# Altium PCB PokerFaceTestBoard.PcbDoc
Units mm, origin at the board's own origin, x right, y up, seen from the top; angles counter-clockwise.
Board outline 90.68 x 59.69 mm, 2 copper layers (Top Layer, Bottom Layer); 164 components, 159 nets, 418 pads, 38 vias.
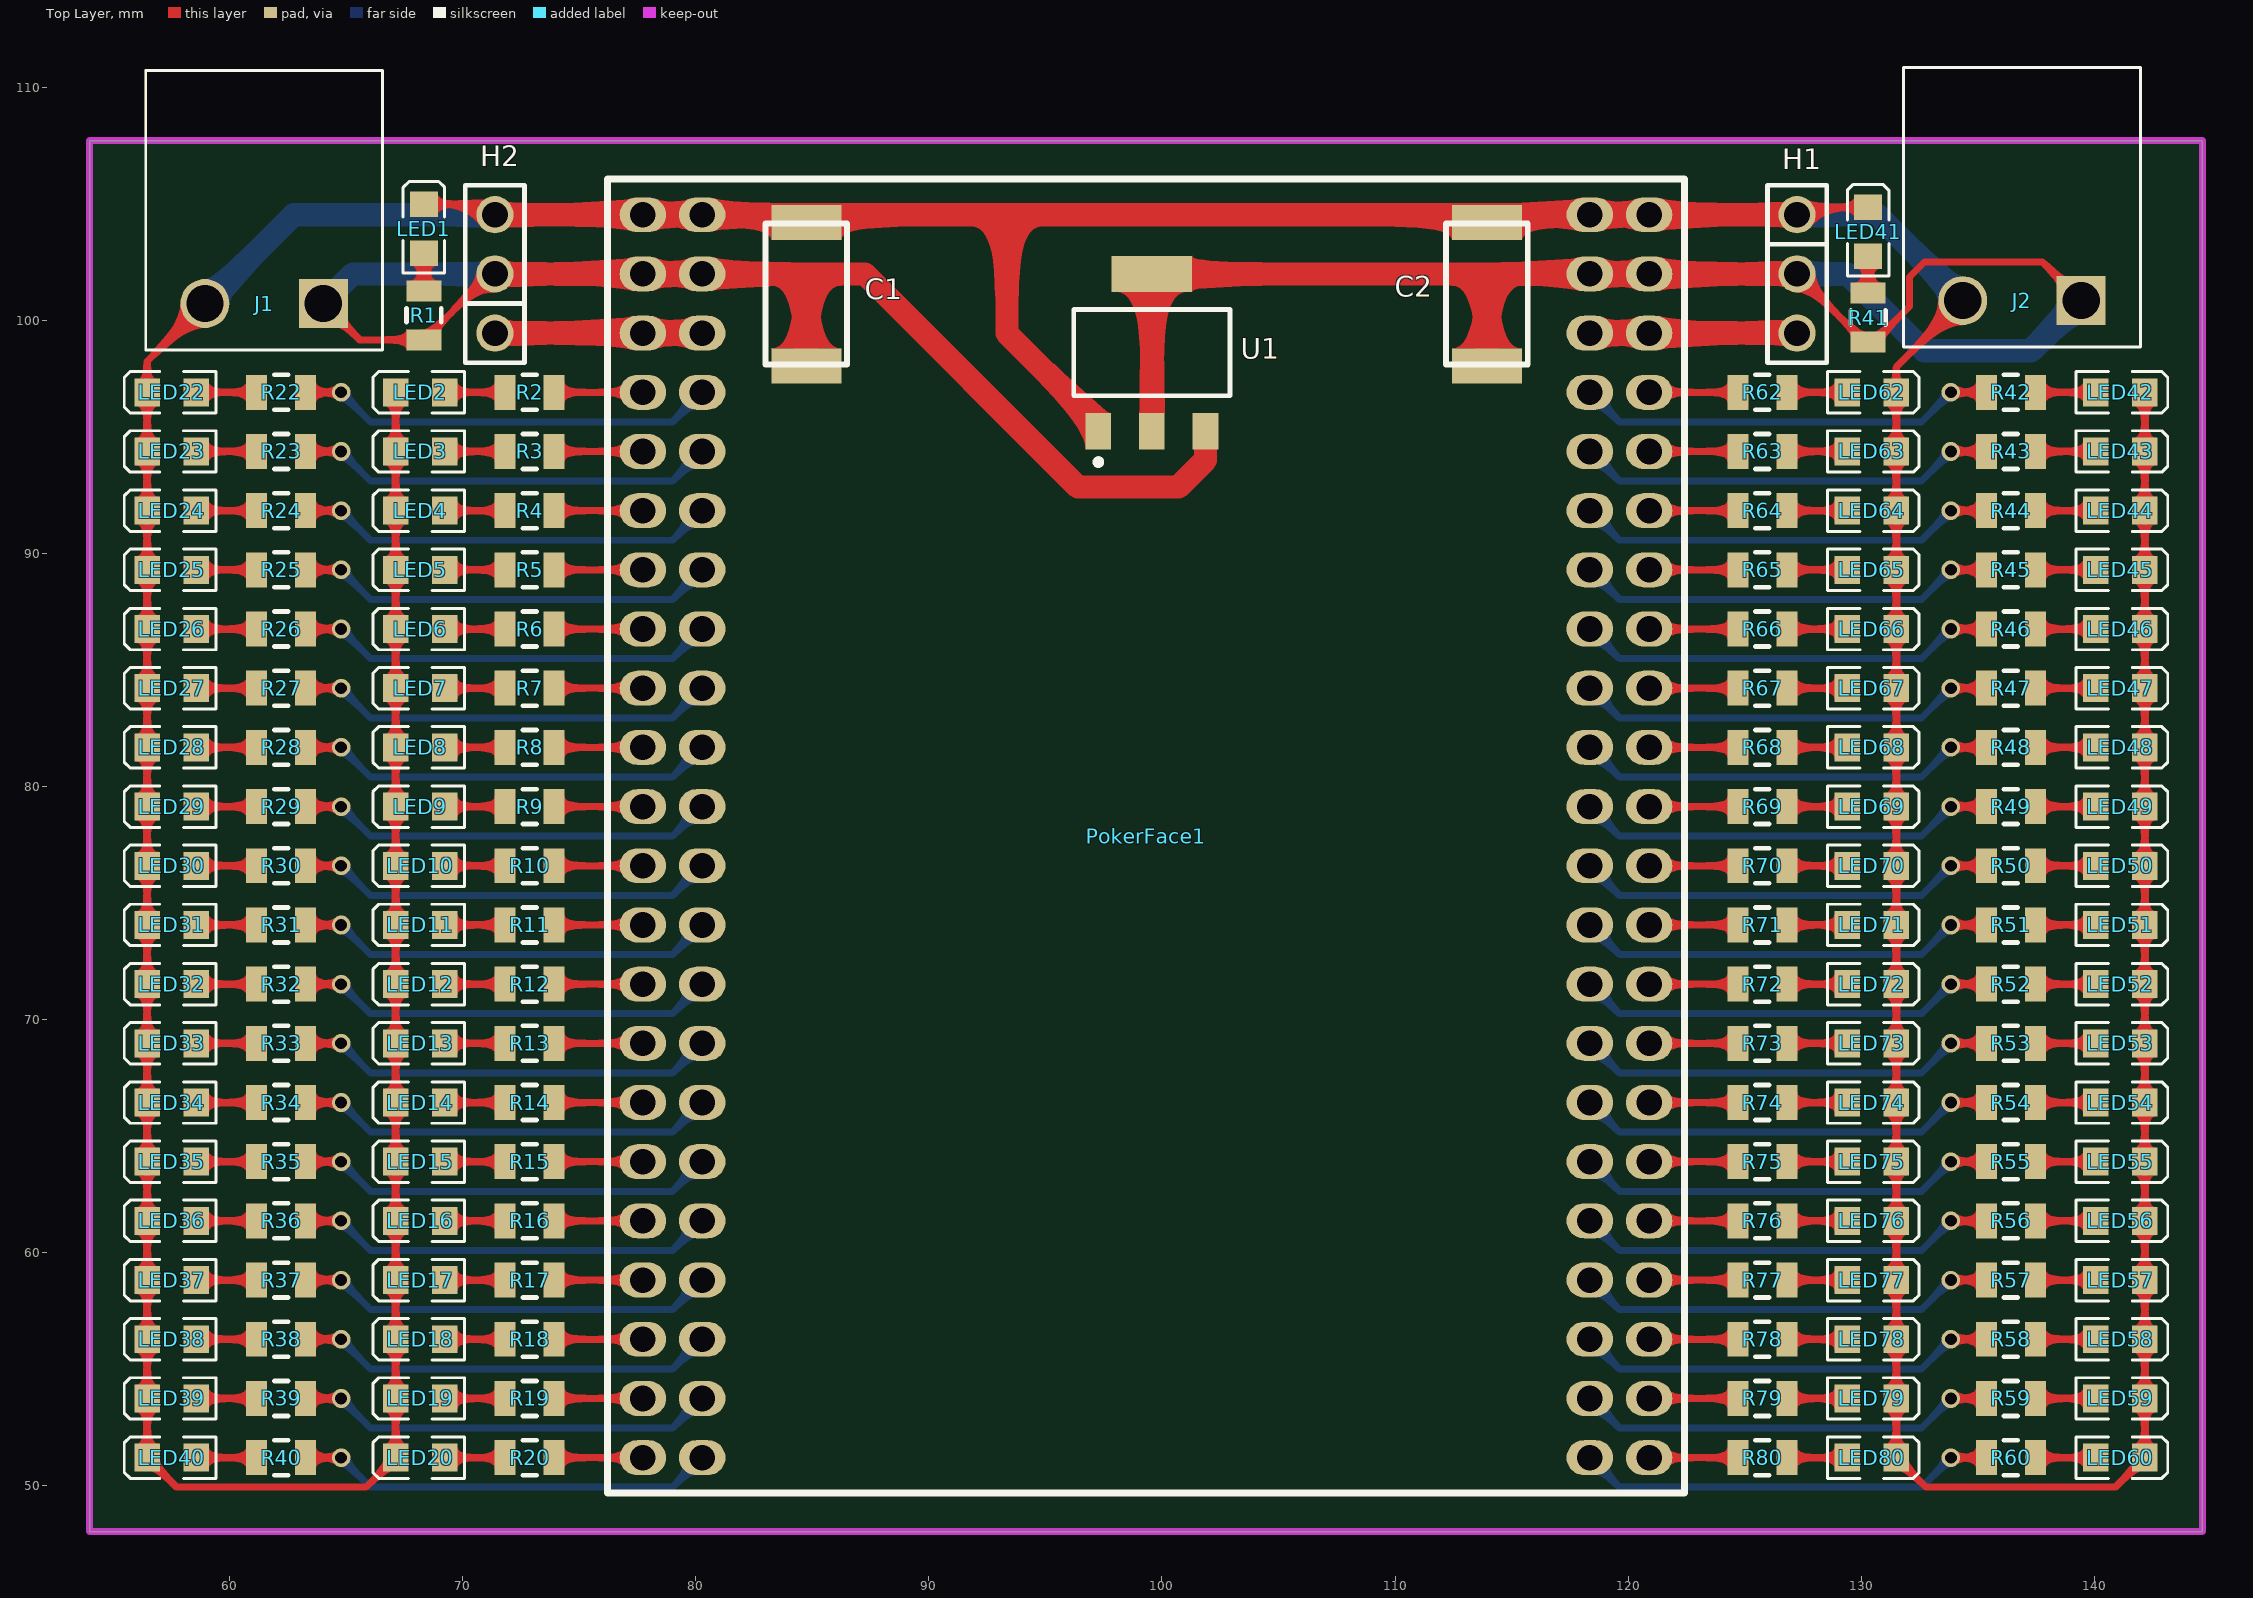
[diagram p0: Top Layer view]
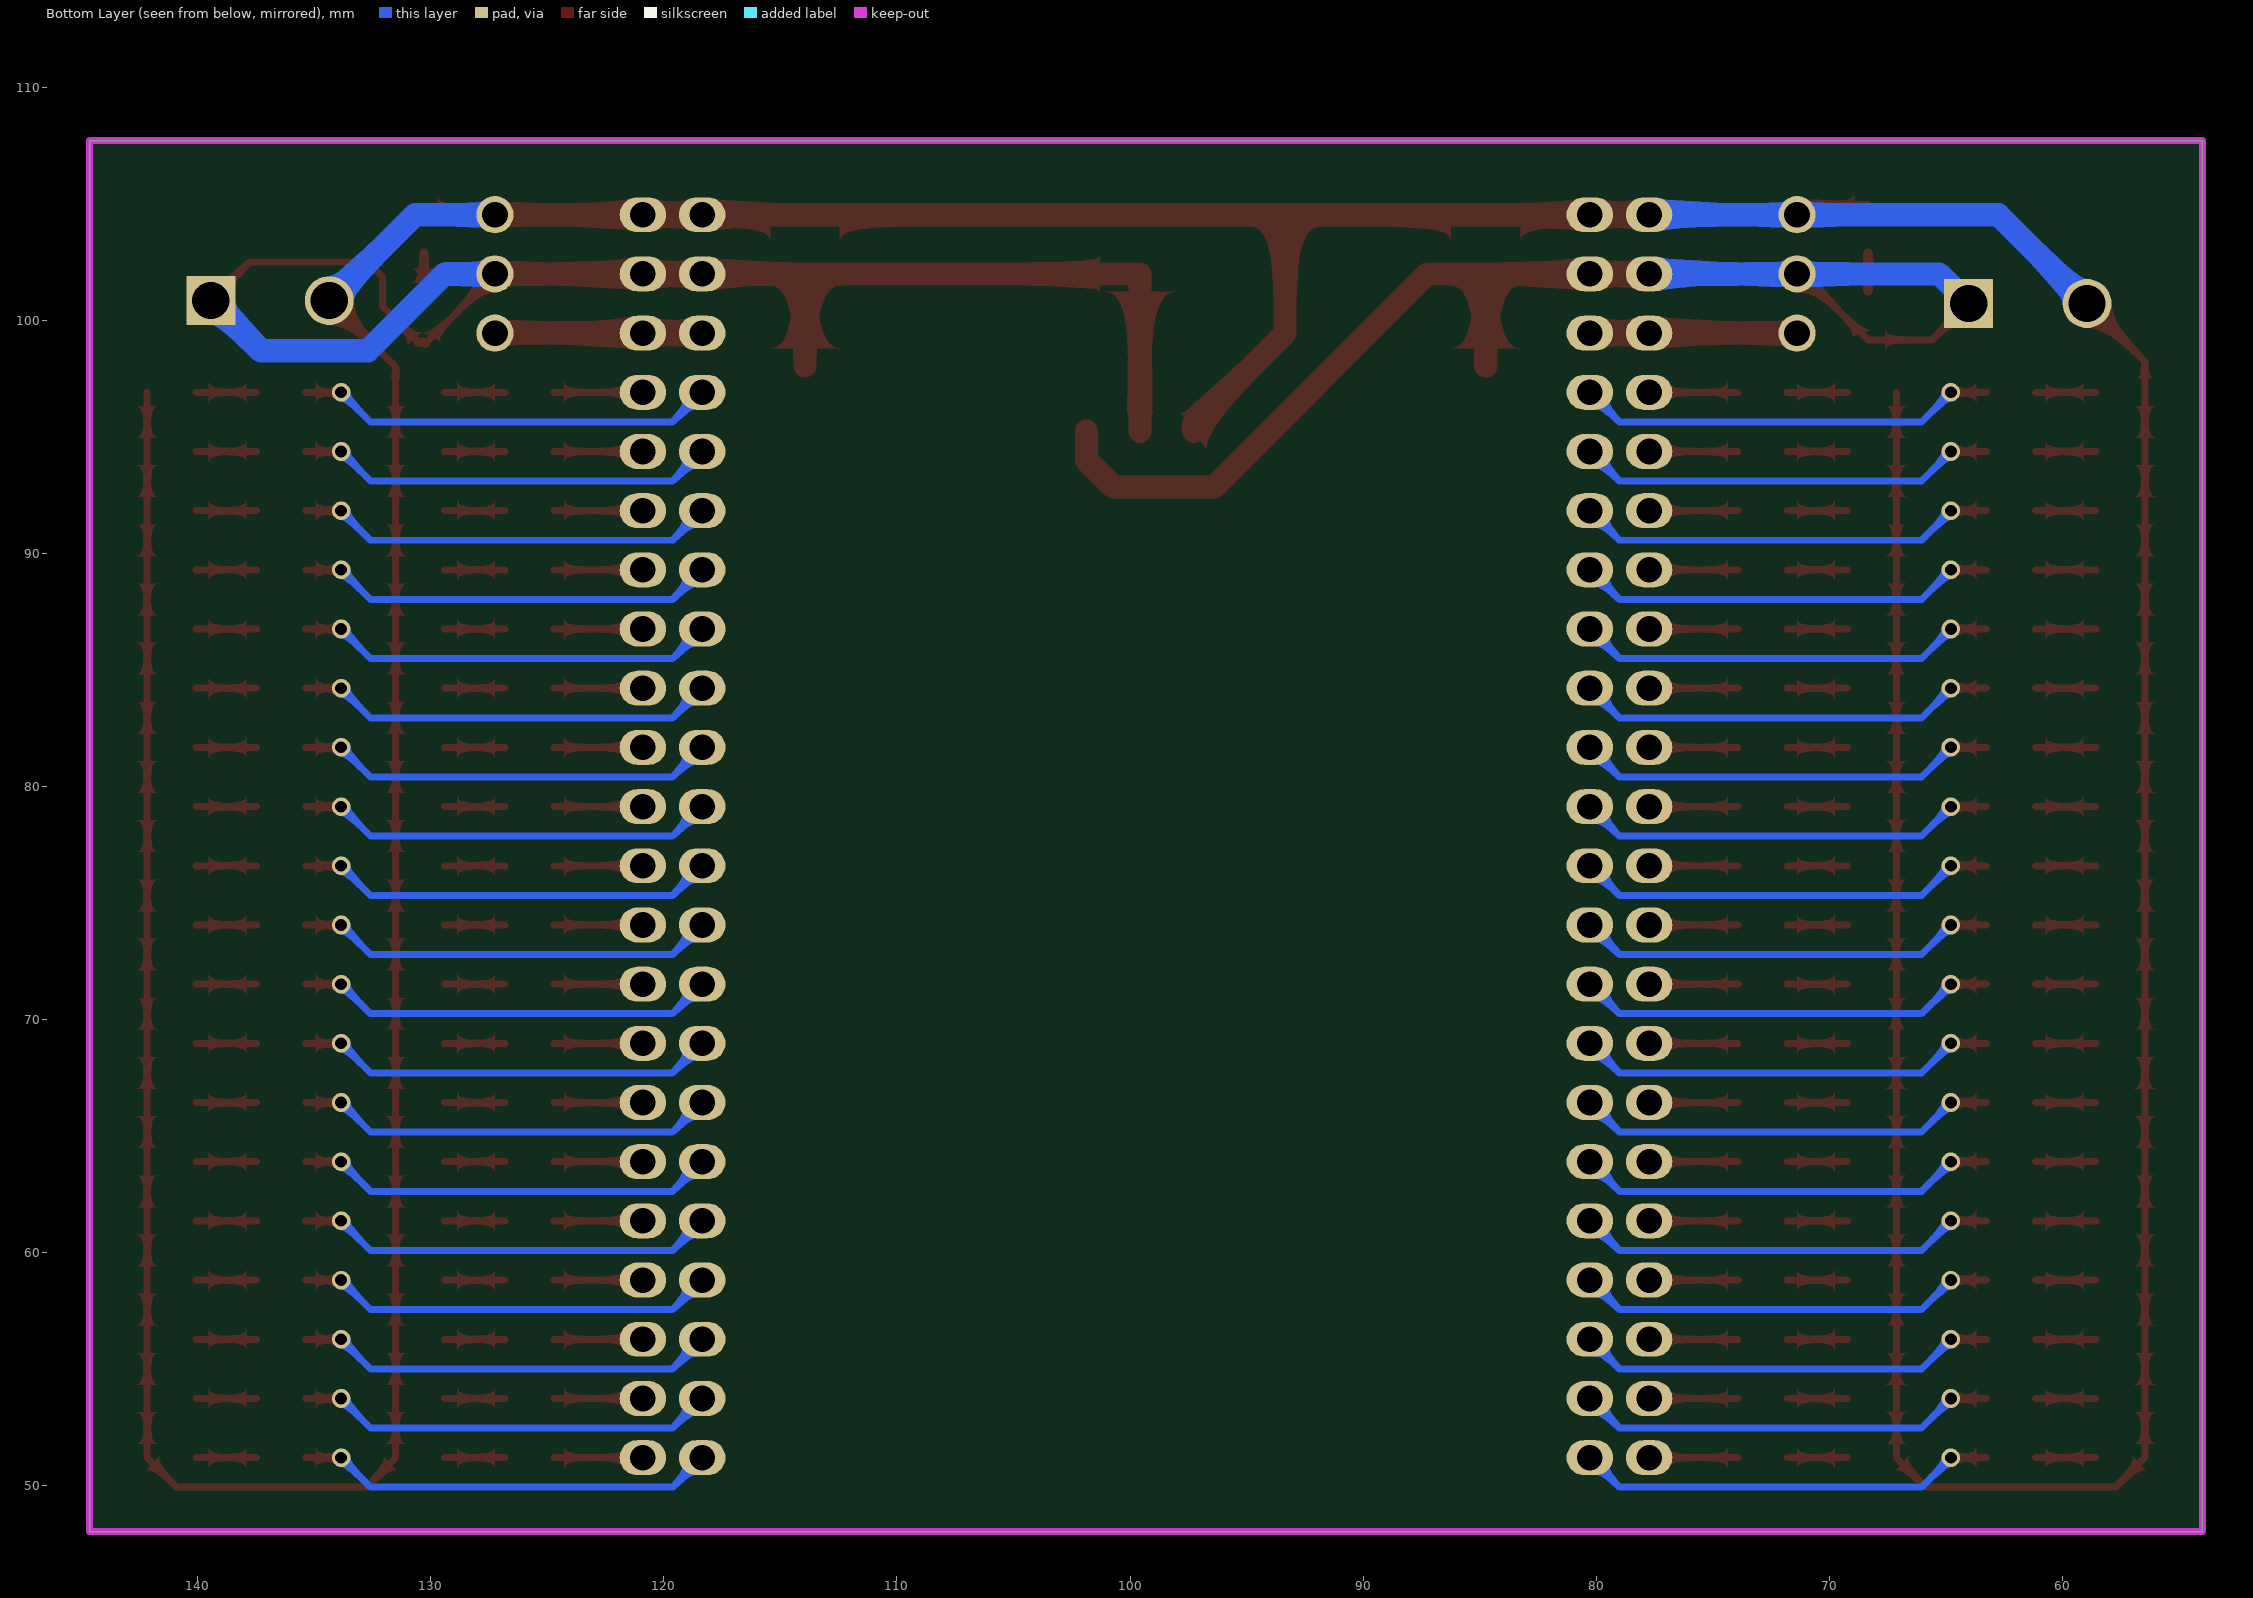
[diagram p1: Bottom Layer view, seen from below]

## Layer stack, top to bottom
Top Solder: solder mask 0.0102, Solder Resist, Dk 3.5
Top Layer: signal copper 0.0356
Dielectric 1: dielectric 0.32, FR-4, Dk 4.8
Bottom Layer: signal copper 0.0356
Bottom Solder: solder mask 0.0102, Solder Resist, Dk 3.5

## Board outline
53.975,48.006 53.975,107.696 144.653,107.696 144.653,48.006

## Design rules (kind name [scope] priority, off if disabled: settings)
Clearance [All] p1: gap=0.2 ignorepadtopadclearanceinfootprint=FALSE
PolygonConnect [All] p1: connectstyle=Relief reliefconductorwidth=0.254 reliefentries=4 polygonreliefangle="90 Angle" airgapwidth=0.254
RoutingVias [All] p1: holewidth=0.711 width=1.27 viastyle="Through Hole" minholewidth=0.711 minwidth=1.27 maxholewidth=0.711 maxwidth=1.27
SolderMaskExpansion [All] p1: expansion=0.102
Width [All] p1: maxlimit=1 minlimit=0.2 preferedwidth=0.4
30 further rules are at their usual default settings.

## Components (designator, comment, footprint, x,y, rotation, side; value= is the part's Value field where it differs from the comment)
C1 "TantalD-220uF" MY_CAP_SMD-D 84.836,100.838 r90 top value=3300u
C2 "TantalD-220uF" MY_CAP_SMD-D 114.046,100.838 r90 top value=3300u
H1 "WE-2.54 mm Pin Header & Jumper 61300311121" 61300311121 127.254,104.521 r270 top
H2 "WE-2.54 mm Pin Header & Jumper 61300311121" 61300311121 71.374,99.441 r90 top
J1 "691312510002" 691312510002 61.468,100.711 r180 top
J2 "691312510002" 691312510002 136.906,100.838 r180 top
LED1 "150080BS75000" LED_0805_Blue 68.326,103.92 r90 top
LED2 "150080BS75000" LED_0805_Blue 68.165,96.901 r180 top
LED3 "150080BS75000" LED_0805_Blue 68.165,94.361 r180 top
LED4 "150080BS75000" LED_0805_Blue 68.165,91.821 r180 top
LED5 "150080BS75000" LED_0805_Blue 68.165,89.281 r180 top
LED6 "150080BS75000" LED_0805_Blue 68.165,86.741 r180 top
LED7 "150080BS75000" LED_0805_Blue 68.165,84.201 r180 top
LED8 "150080BS75000" LED_0805_Blue 68.165,81.661 r180 top
LED9 "150080BS75000" LED_0805_Blue 68.165,79.121 r180 top
LED10 "150080BS75000" LED_0805_Blue 68.165,76.581 r180 top
LED11 "150080BS75000" LED_0805_Blue 68.165,74.041 r180 top
LED12 "150080BS75000" LED_0805_Blue 68.165,71.501 r180 top
LED13 "150080BS75000" LED_0805_Blue 68.165,68.961 r180 top
LED14 "150080BS75000" LED_0805_Blue 68.165,66.421 r180 top
LED15 "150080BS75000" LED_0805_Blue 68.165,63.881 r180 top
LED16 "150080BS75000" LED_0805_Blue 68.165,61.341 r180 top
LED17 "150080BS75000" LED_0805_Blue 68.165,58.801 r180 top
LED18 "150080BS75000" LED_0805_Blue 68.165,56.261 r180 top
LED19 "150080BS75000" LED_0805_Blue 68.165,53.721 r180 top
LED20 "150080BS75000" LED_0805_Blue 68.165,51.181 r180 top
LED22 "150080BS75000" LED_0805_Blue 57.497,96.901 r180 top
LED23 "150080BS75000" LED_0805_Blue 57.497,94.361 r180 top
LED24 "150080BS75000" LED_0805_Blue 57.497,91.821 r180 top
LED25 "150080BS75000" LED_0805_Blue 57.497,89.281 r180 top
LED26 "150080BS75000" LED_0805_Blue 57.497,86.741 r180 top
LED27 "150080BS75000" LED_0805_Blue 57.497,84.201 r180 top
LED28 "150080BS75000" LED_0805_Blue 57.497,81.661 r180 top
LED29 "150080BS75000" LED_0805_Blue 57.497,79.121 r180 top
LED30 "150080BS75000" LED_0805_Blue 57.497,76.581 r180 top
LED31 "150080BS75000" LED_0805_Blue 57.497,74.041 r180 top
LED32 "150080BS75000" LED_0805_Blue 57.497,71.501 r180 top
LED33 "150080BS75000" LED_0805_Blue 57.497,68.961 r180 top
LED34 "150080BS75000" LED_0805_Blue 57.497,66.421 r180 top
LED35 "150080BS75000" LED_0805_Blue 57.497,63.881 r180 top
LED36 "150080BS75000" LED_0805_Blue 57.497,61.341 r180 top
LED37 "150080BS75000" LED_0805_Blue 57.497,58.801 r180 top
LED38 "150080BS75000" LED_0805_Blue 57.497,56.261 r180 top
LED39 "150080BS75000" LED_0805_Blue 57.497,53.721 r180 top
LED40 "150080BS75000" LED_0805_Blue 57.497,51.181 r180 top
LED41 "150080BS75000" LED_0805_Blue 130.302,103.793 r90 top
LED42 "150080BS75000" LED_0805_Blue 141.131,96.901 r0 top
LED43 "150080BS75000" LED_0805_Blue 141.131,94.361 r0 top
LED44 "150080BS75000" LED_0805_Blue 141.131,91.821 r0 top
LED45 "150080BS75000" LED_0805_Blue 141.131,89.281 r0 top
LED46 "150080BS75000" LED_0805_Blue 141.131,86.741 r0 top
LED47 "150080BS75000" LED_0805_Blue 141.131,84.201 r0 top
LED48 "150080BS75000" LED_0805_Blue 141.131,81.661 r0 top
LED49 "150080BS75000" LED_0805_Blue 141.131,79.121 r0 top
LED50 "150080BS75000" LED_0805_Blue 141.131,76.581 r0 top
LED51 "150080BS75000" LED_0805_Blue 141.131,74.041 r0 top
LED52 "150080BS75000" LED_0805_Blue 141.131,71.501 r0 top
LED53 "150080BS75000" LED_0805_Blue 141.131,68.961 r0 top
LED54 "150080BS75000" LED_0805_Blue 141.131,66.421 r0 top
LED55 "150080BS75000" LED_0805_Blue 141.131,63.881 r0 top
LED56 "150080BS75000" LED_0805_Blue 141.131,61.341 r0 top
LED57 "150080BS75000" LED_0805_Blue 141.131,58.801 r0 top
LED58 "150080BS75000" LED_0805_Blue 141.131,56.261 r0 top
LED59 "150080BS75000" LED_0805_Blue 141.131,53.721 r0 top
LED60 "150080BS75000" LED_0805_Blue 141.131,51.181 r0 top
LED62 "150080BS75000" LED_0805_Blue 130.463,96.901 r0 top
LED63 "150080BS75000" LED_0805_Blue 130.463,94.361 r0 top
LED64 "150080BS75000" LED_0805_Blue 130.463,91.821 r0 top
LED65 "150080BS75000" LED_0805_Blue 130.463,89.281 r0 top
LED66 "150080BS75000" LED_0805_Blue 130.463,86.741 r0 top
LED67 "150080BS75000" LED_0805_Blue 130.463,84.201 r0 top
LED68 "150080BS75000" LED_0805_Blue 130.463,81.661 r0 top
LED69 "150080BS75000" LED_0805_Blue 130.463,79.121 r0 top
LED70 "150080BS75000" LED_0805_Blue 130.463,76.581 r0 top
LED71 "150080BS75000" LED_0805_Blue 130.463,74.041 r0 top
LED72 "150080BS75000" LED_0805_Blue 130.463,71.501 r0 top
LED73 "150080BS75000" LED_0805_Blue 130.463,68.961 r0 top
LED74 "150080BS75000" LED_0805_Blue 130.463,66.421 r0 top
LED75 "150080BS75000" LED_0805_Blue 130.463,63.881 r0 top
LED76 "150080BS75000" LED_0805_Blue 130.463,61.341 r0 top
LED77 "150080BS75000" LED_0805_Blue 130.463,58.801 r0 top
LED78 "150080BS75000" LED_0805_Blue 130.463,56.261 r0 top
LED79 "150080BS75000" LED_0805_Blue 130.463,53.721 r0 top
LED80 "150080BS75000" LED_0805_Blue 130.463,51.181 r0 top
PokerFace1 "POKERFACEV1-1" PokerFaceV1-1 99.314,77.851 r0 top locked
R1 "470" "SMD 805" 68.326,100.203 r270 top
R2 "470" "SMD 805" 72.864,96.901 r0 top
R3 "470" "SMD 805" 72.864,94.361 r0 top
R4 "470" "SMD 805" 72.864,91.821 r0 top
R5 "470" "SMD 805" 72.864,89.281 r0 top
R6 "470" "SMD 805" 72.864,86.741 r0 top
R7 "470" "SMD 805" 72.864,84.201 r0 top
R8 "470" "SMD 805" 72.864,81.661 r0 top
R9 "470" "SMD 805" 72.864,79.121 r0 top
R10 "470" "SMD 805" 72.864,76.581 r0 top
R11 "470" "SMD 805" 72.864,74.041 r0 top
R12 "470" "SMD 805" 72.864,71.501 r0 top
R13 "470" "SMD 805" 72.864,68.961 r0 top
R14 "470" "SMD 805" 72.864,66.421 r0 top
R15 "470" "SMD 805" 72.864,63.881 r0 top
R16 "470" "SMD 805" 72.864,61.341 r0 top
R17 "470" "SMD 805" 72.864,58.801 r0 top
R18 "470" "SMD 805" 72.864,56.261 r0 top
R19 "470" "SMD 805" 72.864,53.721 r0 top
R20 "470" "SMD 805" 72.864,51.181 r0 top
R22 "470" "SMD 805" 62.196,96.901 r0 top
R23 "470" "SMD 805" 62.196,94.361 r0 top
R24 "470" "SMD 805" 62.196,91.821 r0 top
R25 "470" "SMD 805" 62.196,89.281 r0 top
R26 "470" "SMD 805" 62.196,86.741 r0 top
R27 "470" "SMD 805" 62.196,84.201 r0 top
R28 "470" "SMD 805" 62.196,81.661 r0 top
R29 "470" "SMD 805" 62.196,79.121 r0 top
R30 "470" "SMD 805" 62.196,76.581 r0 top
R31 "470" "SMD 805" 62.196,74.041 r0 top
R32 "470" "SMD 805" 62.196,71.501 r0 top
R33 "470" "SMD 805" 62.196,68.961 r0 top
R34 "470" "SMD 805" 62.196,66.421 r0 top
R35 "470" "SMD 805" 62.196,63.881 r0 top
R36 "470" "SMD 805" 62.196,61.341 r0 top
R37 "470" "SMD 805" 62.196,58.801 r0 top
R38 "470" "SMD 805" 62.196,56.261 r0 top
R39 "470" "SMD 805" 62.196,53.721 r0 top
R40 "470" "SMD 805" 62.196,51.181 r0 top
R41 "470" "SMD 805" 130.302,100.11 r270 top
R42 "470" "SMD 805" 136.432,96.901 r180 top
R43 "470" "SMD 805" 136.432,94.361 r180 top
R44 "470" "SMD 805" 136.432,91.821 r180 top
R45 "470" "SMD 805" 136.432,89.281 r180 top
R46 "470" "SMD 805" 136.432,86.741 r180 top
R47 "470" "SMD 805" 136.432,84.201 r180 top
R48 "470" "SMD 805" 136.432,81.661 r180 top
R49 "470" "SMD 805" 136.432,79.121 r180 top
R50 "470" "SMD 805" 136.432,76.581 r180 top
R51 "470" "SMD 805" 136.432,74.041 r180 top
R52 "470" "SMD 805" 136.432,71.501 r180 top
R53 "470" "SMD 805" 136.432,68.961 r180 top
R54 "470" "SMD 805" 136.432,66.421 r180 top
R55 "470" "SMD 805" 136.432,63.881 r180 top
R56 "470" "SMD 805" 136.432,61.341 r180 top
R57 "470" "SMD 805" 136.432,58.801 r180 top
R58 "470" "SMD 805" 136.432,56.261 r180 top
R59 "470" "SMD 805" 136.432,53.721 r180 top
R60 "470" "SMD 805" 136.432,51.181 r180 top
R62 "470" "SMD 805" 125.764,96.901 r180 top
R63 "470" "SMD 805" 125.764,94.361 r180 top
R64 "470" "SMD 805" 125.764,91.821 r180 top
R65 "470" "SMD 805" 125.764,89.281 r180 top
R66 "470" "SMD 805" 125.764,86.741 r180 top
R67 "470" "SMD 805" 125.764,84.201 r180 top
R68 "470" "SMD 805" 125.764,81.661 r180 top
R69 "470" "SMD 805" 125.764,79.121 r180 top
R70 "470" "SMD 805" 125.764,76.581 r180 top
R71 "470" "SMD 805" 125.764,74.041 r180 top
R72 "470" "SMD 805" 125.764,71.501 r180 top
R73 "470" "SMD 805" 125.764,68.961 r180 top
R74 "470" "SMD 805" 125.764,66.421 r180 top
R75 "470" "SMD 805" 125.764,63.881 r180 top
R76 "470" "SMD 805" 125.764,61.341 r180 top
R77 "470" "SMD 805" 125.764,58.801 r180 top
R78 "470" "SMD 805" 125.764,56.261 r180 top
R79 "470" "SMD 805" 125.764,53.721 r180 top
R80 "470" "SMD 805" 125.764,51.181 r180 top
U1 "LD1117 3.3" MY_LD1117-3.3 99.568,98.733 r0 top

## Footprints (in the part's own frame and the unit in brackets; to place one, negate y for a bottom-side part, rotate by r counter-clockwise, add the part's x,y. Pads: shape width x height; smd on the part's side, far side on the other; paste and mask are expansions set on the pad)
61300311121 [mm] "3 pins, 1 row, straight, gold plating"
  round 1.6 hole 1.1: 1(0,0) 2(2.54,0) 3(5.08,0)
  silkscreen extent -1.27,-1.27 6.35,1.27, body extent -1.27,-1.27 6.35,1.27, height 8.54
691312510002 [mm] "5,08mm - PCB Headers - Horizontal - Opened ends - 02p"
  rect 2.1x2.1 hole 1.6: 1(-2.54,0)
  round 2.1 hole 1.6: 2(2.54,0)
  silkscreen extent -5.08,-10 5.08,2, body extent -5.08,-10 5.08,2, height 8.51
LED_0805_Blue [mm] "Chip LED, 2-Leads, Body 2.0x1.3mm, IPC Medium Density"
  rect 1.1x1.2 smd: 1(-1.05,0) 2(1.05,0)
  silkscreen extent -1.91,-0.89 2.03,0.89, body extent -1,-0.63 1,0.62, height 0.68
MY_CAP_SMD-D [mm] "3.5X6"
  rect 1.5x3 smd: +(-2.8,0.1) -(3.35,0.1)
  silkscreen extent -2.75,-1.65 3.3,1.85, body extent -2.6,-1.5 3.2,1.7, height 2.6
MY_LD1117-3.3 [mm]
  rect 1.1x1.55 smd: 1(-2.3,-3.502) 2(0,-3.502) 3(2.3,-3.502)
  rect 3.45x1.55 smd: 4(0,3.248)
  silkscreen extent -3.35,-4.95 3.35,1.72, body extent -3.3,-3.85 3.2,3.05, height 1.6
PokerFaceV1-1 [mm]
  oval 2x1.5 hole 1.1: 1(-21.59,26.67) 2(-21.59,24.13) 3(-21.59,21.59) 4(-21.59,19.05) 5(-21.59,16.51) 6(-21.59,13.97) 7(-21.59,11.43) 8(-21.59,8.89) 9(-21.59,6.35) 10(-21.59,3.81) 11(-21.59,1.27) 12(-21.59,-1.27) 13(-21.59,-3.81) 14(-21.59,-6.35) 15(-21.59,-8.89) 16(-21.59,-11.43) 17(-21.59,-13.97) 18(-21.59,-16.51) 19(-21.59,-19.05) 20(-21.59,-21.59) 21(-21.59,-24.13) 22(-21.59,-26.67) 23(-19.05,-26.67) 24(-19.05,-24.13) 25(-19.05,-21.59) 26(-19.05,-19.05) 27(-19.05,-16.51) 28(-19.05,-13.97) 29(-19.05,-11.43) 30(-19.05,-8.89) 31(-19.05,-6.35) 32(-19.05,-3.81) 33(-19.05,-1.27) 34(-19.05,1.27) 35(-19.05,3.81) 36(-19.05,6.35) 37(-19.05,8.89) 38(-19.05,11.43) 39(-19.05,13.97) 40(-19.05,16.51) 41(-19.05,19.05) 42(-19.05,21.59) 43(-19.05,24.13) 44(-19.05,26.67) 45(19.05,26.67) 46(19.05,24.13) 47(19.05,21.59) 48(19.05,19.05) 49(19.05,16.51) 50(19.05,13.97) 51(19.05,11.43) 52(19.05,8.89) 53(19.05,6.35) 54(19.05,3.81) 55(19.05,1.27) 56(19.05,-1.27) 57(19.05,-3.81) 58(19.05,-6.35) 59(19.05,-8.89) 60(19.05,-11.43) 61(19.05,-13.97) 62(19.05,-16.51) 63(19.05,-19.05) 64(19.05,-21.59) 65(19.05,-24.13) 66(19.05,-26.67) 67(21.59,-26.67) 68(21.59,-24.13) 69(21.59,-21.59) 70(21.59,-19.05) 71(21.59,-16.51) 72(21.59,-13.97) 73(21.59,-11.43) 74(21.59,-8.89) 75(21.59,-6.35) 76(21.59,-3.81) 77(21.59,-1.27) 78(21.59,1.27) 79(21.59,3.81) 80(21.59,6.35) 81(21.59,8.89) 82(21.59,11.43) 83(21.59,13.97) 84(21.59,16.51) 85(21.59,19.05) 86(21.59,21.59) 87(21.59,24.13) 88(21.59,26.67)
  silkscreen extent -23.11,-28.19 23.11,28.19, body extent -22.86,-28.19 22.86,28.19, height 8.51
"SMD 805" [mm]
  rect 0.9x1.5 smd: 1(1.05,0) 2(-1.05,0)
  silkscreen extent -0.3,-0.75 0.3,0.75, body extent -1,-0.62 1,0.63, height 0.78

## Part data
C1 C2: library part CAP_TANTAL_D, "7.3X4.3MM"
H1 H2: "WR-PHD 2.54mm Pin Header", Manufacturer="Würth Elektronik eiSos GmbH", partNo=61300311121, ComponentLink1 Description=Manufacturer, ComponentLink1URL=http://www.we-online.com, ComponentLink2 Description=Datasheet, ComponentLink2URL=http://katalog.we-online.de/em/datasheet/6130xx11121.pdf, Created by="Karrer Zheng", Created Date="22 March 2013", NoPins=03
J1 J2: "WR-TBL Terminal Blocks Serie 312 – 5.08 mm", Manufacturer="Würth Elektronik eiSos GmbH", ComponentLink1 Description=Manufacturer, ComponentLink1URL=http://www.we-online.com, ComponentLink2 Description=Datasheet, ComponentLink2URL=http://katalog.we-online.de/em/datasheet/6913125100xx.pdf, Created by="Karrer Zheng", Created Date="31 March 2014", NoPins=02, partNo=691312510002
LED1 LED2 LED3 LED4 LED5 LED6 LED7 LED8 LED9 LED10 LED11 LED12 LED13 LED14 LED15 LED16 LED17 LED18 LED19 LED20 LED22 LED23 LED24 LED25 LED26 LED27 LED28 LED29 LED30 LED31 LED32 LED33 LED34 LED35 LED36 LED37 LED38 LED39 LED40 LED41 LED42 LED43 LED44 LED45 LED46 LED47 LED48 LED49 LED50 LED51 LED52 LED53 LED54 LED55 LED56 LED57 LED58 LED59 LED60 LED62 LED63 LED64 LED65 LED66 LED67 LED68 LED69 LED70 LED71 LED72 LED73 LED74 LED75 LED76 LED77 LED78 LED79 LED80: library part "WL-SMCW 0805  150080BS75000", "SMD mono-color Chip LED, WL-SMCW, Blue", Color=Blue, Manufacturer="W?th Elektronik eiSos GmbH", ComponentLink1Description=Manufacturer, ComponentLink1URL=http://www.we-online.de, ComponentLink2Description=Datasheet, ComponentLink2URL=http://katalog.we-online.com/led/datasheet/150080BS75000.pdf, Created by="Christin Otto", Created Date="June 2013", partNo=150080BS75000
R1 R2 R3 R4 R5 R6 R7 R8 R9 R10 R11 R12 R13 R14 R15 R16 R17 R18 R19 R20 R22 R23 R24 R25 R26 R27 R28 R29 R30 R31 R32 R33 R34 R35 R36 R37 R38 R39 R40 R41 R42 R43 R44 R45 R46 R47 R48 R49 R50 R51 R52 R53 R54 R55 R56 R57 R58 R59 R60 R62 R63 R64 R65 R66 R67 R68 R69 R70 R71 R72 R73 R74 R75 R76 R77 R78 R79 R80: library part Resistor

## Via types
v1: diameter 0.8, hole 0.5, Top Layer to Bottom Layer, 38 vias

## Nets (pads, with @x,y where several pads share a name; then routed paths per layer and width w, separated by ;. In a path a pad name is that pad's centre, name@x,y a point inside that pad or via, vN(x,y) a via of type N, cw(c..) or ccw(c..) an arc to the next point about the centre after c; other vN are vias at no path point)
3.3V: C2.+ H1.2 J2.1 PokerFace1.46 PokerFace1.87 R41.1 U1.2 U1.4 | length 69.1
  Top Layer w0.3: H1.2 R41.1@130.238,98.996 ; R41.1@130.556,99.06 132.08,100.584 132.08,101.854 132.715,102.489 137.795,102.489 J2.1
  Top Layer w0.4: R41.1@130.238,98.996 R41.1 R41.1@130.556,99.06
  Top Layer w1: U1.2 U1.4 PokerFace1.46 PokerFace1.87 H1.2 ; C2.+ 113.946,101.981
  Bottom Layer w1: H1.2 129.413,101.981 132.715,98.679 137.287,98.679 J2.1
3.3VRef: H2.1 PokerFace1.3 PokerFace1.42 | length 8.9
  Top Layer w1: H2.1 PokerFace1.3 PokerFace1.42
5V: C1.+ H2.2 J1.1 PokerFace1.2 PokerFace1.43 R1.1 U1.3 | length 63.4
  Top Layer w0.3: J1.1 65.566,99.153 R1.1 H2.2@71.154,101.981
  Top Layer w0.4: H2.2@71.154,101.981 H2.2
  Top Layer w1: H2.2 PokerFace1.2 PokerFace1.43 87.249,101.981 96.393,92.837 100.711,92.837 101.868,93.994 U1.3 ; C1.+ 84.736,101.981
  Bottom Layer w1: J1.1 65.278,101.981 PokerFace1.2
GND: C1.- C2.- H1.1 H2.3 J1.2 J2.2 LED1.2 LED2.2 LED3.2 LED4.2 LED5.2 LED6.2 LED7.2 LED8.2 LED9.2 LED10.2 LED11.2 LED12.2 LED13.2 LED14.2 LED15.2 LED16.2 LED17.2 LED18.2 LED19.2 LED20.2 LED22.2 LED23.2 LED24.2 LED25.2 LED26.2 LED27.2 LED28.2 LED29.2 LED30.2 LED31.2 LED32.2 LED33.2 LED34.2 LED35.2 LED36.2 LED37.2 LED38.2 LED39.2 LED40.2 LED41.2 LED42.2 LED43.2 LED44.2 LED45.2 LED46.2 LED47.2 LED48.2 LED49.2 LED50.2 LED51.2 LED52.2 LED53.2 LED54.2 LED55.2 LED56.2 LED57.2 LED58.2 LED59.2 LED60.2 LED62.2 LED63.2 LED64.2 LED65.2 LED66.2 LED67.2 LED68.2 LED69.2 LED70.2 LED71.2 LED72.2 LED73.2 LED74.2 LED75.2 LED76.2 LED77.2 LED78.2 LED79.2 LED80.2 PokerFace1.1 PokerFace1.44 PokerFace1.45 PokerFace1.88 U1.1 | length 318.5
  Top Layer w0.3: J1.2 56.447,98.23 LED22.2 LED23.2 LED24.2 LED25.2 LED26.2 LED27.2 LED28.2 LED29.2 LED30.2 LED31.2 LED32.2 LED33.2 LED34.2 LED35.2 LED36.2 LED37.2 LED38.2 LED39.2 LED40.2 57.717,49.911 65.845,49.911 LED20.2 LED19.2 LED18.2 LED17.2 LED16.2 LED15.2 LED14.2 LED13.2 LED12.2 LED11.2 LED10.2 LED9.2 LED8.2 LED7.2 LED6.2 LED5.2 LED4.2 LED3.2 LED2.2 ; LED1.2 70.925,104.97 H2.3 ; H1.1 127.576,104.843 LED41.2 ; J2.2 131.513,97.985 LED62.2 LED63.2 LED64.2 LED65.2 LED66.2 LED67.2 LED68.2 LED69.2 LED70.2 LED71.2 LED72.2 LED73.2 LED74.2 LED75.2 LED76.2 LED77.2 LED78.2 LED79.2 LED80.2 132.783,49.911 140.911,49.911 LED60.2 LED59.2 LED58.2 LED57.2 LED56.2 LED55.2 LED54.2 LED53.2 LED52.2 LED51.2 LED50.2 LED49.2 LED48.2 LED47.2 LED46.2 LED45.2 LED44.2 LED43.2 LED42.2
  Top Layer w1: H2.3 PokerFace1.1 PokerFace1.44 93.345,104.521 ; U1.1 97.268,95.518 93.345,99.441 93.345,104.521 ; H1.1 PokerFace1.88 PokerFace1.45 93.345,104.521
  Bottom Layer w1: J1.2 62.738,104.521 PokerFace1.1 ; H1.1 130.683,104.521 J2.2
NetLED1_1: LED1.1 R1.2 | length 1.6
  Top Layer w0.4: R1.2 LED1.1
NetLED2_1: LED2.1 R2.2 | length 2.6
  Top Layer w0.3: LED2.1 R2.2
NetLED3_1: LED3.1 R3.2 | length 2.6
  Top Layer w0.3: LED3.1 R3.2
NetLED4_1: LED4.1 R4.2 | length 2.6
  Top Layer w0.3: LED4.1 R4.2
NetLED5_1: LED5.1 R5.2 | length 2.6
  Top Layer w0.3: LED5.1 R5.2
NetLED6_1: LED6.1 R6.2 | length 2.6
  Top Layer w0.3: LED6.1 R6.2
NetLED7_1: LED7.1 R7.2 | length 2.6
  Top Layer w0.3: LED7.1 R7.2
NetLED8_1: LED8.1 R8.2 | length 2.6
  Top Layer w0.3: LED8.1 R8.2
NetLED9_1: LED9.1 R9.2 | length 2.6
  Top Layer w0.3: LED9.1 R9.2
NetLED10_1: LED10.1 R10.2 | length 2.6
  Top Layer w0.3: LED10.1 R10.2
NetLED11_1: LED11.1 R11.2 | length 2.6
  Top Layer w0.3: LED11.1 R11.2
NetLED12_1: LED12.1 R12.2 | length 2.6
  Top Layer w0.3: LED12.1 R12.2
NetLED13_1: LED13.1 R13.2 | length 2.6
  Top Layer w0.3: LED13.1 R13.2
NetLED14_1: LED14.1 R14.2 | length 2.6
  Top Layer w0.3: LED14.1 R14.2
NetLED15_1: LED15.1 R15.2 | length 2.6
  Top Layer w0.3: LED15.1 R15.2
NetLED16_1: LED16.1 R16.2 | length 2.6
  Top Layer w0.3: LED16.1 R16.2
NetLED17_1: LED17.1 R17.2 | length 2.6
  Top Layer w0.3: LED17.1 R17.2
NetLED18_1: LED18.1 R18.2 | length 2.6
  Top Layer w0.3: LED18.1 R18.2
NetLED19_1: LED19.1 R19.2 | length 2.6
  Top Layer w0.3: LED19.1 R19.2
NetLED20_1: LED20.1 R20.2 | length 2.6
  Top Layer w0.3: LED20.1 R20.2
NetLED22_1: LED22.1 R22.2 | length 2.6
  Top Layer w0.3: LED22.1 R22.2
NetLED23_1: LED23.1 R23.2 | length 2.6
  Top Layer w0.3: LED23.1 R23.2
NetLED24_1: LED24.1 R24.2 | length 2.6
  Top Layer w0.3: LED24.1 R24.2
NetLED25_1: LED25.1 R25.2 | length 2.6
  Top Layer w0.3: LED25.1 R25.2
NetLED26_1: LED26.1 R26.2 | length 2.6
  Top Layer w0.3: LED26.1 R26.2
NetLED27_1: LED27.1 R27.2 | length 2.6
  Top Layer w0.3: LED27.1 R27.2
NetLED28_1: LED28.1 R28.2 | length 2.6
  Top Layer w0.3: LED28.1 R28.2
NetLED29_1: LED29.1 R29.2 | length 2.6
  Top Layer w0.3: LED29.1 R29.2
NetLED30_1: LED30.1 R30.2 | length 2.6
  Top Layer w0.3: LED30.1 R30.2
NetLED31_1: LED31.1 R31.2 | length 2.6
  Top Layer w0.3: LED31.1 R31.2
NetLED32_1: LED32.1 R32.2 | length 2.6
  Top Layer w0.3: LED32.1 R32.2
NetLED33_1: LED33.1 R33.2 | length 2.6
  Top Layer w0.3: LED33.1 R33.2
NetLED34_1: LED34.1 R34.2 | length 2.6
  Top Layer w0.3: LED34.1 R34.2
NetLED35_1: LED35.1 R35.2 | length 2.6
  Top Layer w0.3: LED35.1 R35.2
NetLED36_1: LED36.1 R36.2 | length 2.6
  Top Layer w0.3: LED36.1 R36.2
NetLED37_1: LED37.1 R37.2 | length 2.6
  Top Layer w0.3: LED37.1 R37.2
NetLED38_1: LED38.1 R38.2 | length 2.6
  Top Layer w0.3: LED38.1 R38.2
NetLED39_1: LED39.1 R39.2 | length 2.6
  Top Layer w0.3: LED39.1 R39.2
NetLED40_1: LED40.1 R40.2 | length 2.6
  Top Layer w0.3: LED40.1 R40.2
NetLED41_1: LED41.1 R41.2 | length 1.6
  Top Layer w0.4: R41.2@130.302,101.287 LED41.1 LED41.1@130.302,102.87
NetLED42_1: LED42.1 R42.2 | length 2.6
  Top Layer w0.3: R42.2 LED42.1
NetLED43_1: LED43.1 R43.2 | length 2.6
  Top Layer w0.3: R43.2 LED43.1
NetLED44_1: LED44.1 R44.2 | length 2.6
  Top Layer w0.3: R44.2 LED44.1
NetLED45_1: LED45.1 R45.2 | length 2.6
  Top Layer w0.3: R45.2 LED45.1
NetLED46_1: LED46.1 R46.2 | length 2.6
  Top Layer w0.3: R46.2 LED46.1
NetLED47_1: LED47.1 R47.2 | length 2.6
  Top Layer w0.3: R47.2 LED47.1
NetLED48_1: LED48.1 R48.2 | length 2.6
  Top Layer w0.3: R48.2 LED48.1
NetLED49_1: LED49.1 R49.2 | length 2.6
  Top Layer w0.3: R49.2 LED49.1
NetLED50_1: LED50.1 R50.2 | length 2.6
  Top Layer w0.3: R50.2 LED50.1
NetLED51_1: LED51.1 R51.2 | length 2.6
  Top Layer w0.3: R51.2 LED51.1
NetLED52_1: LED52.1 R52.2 | length 2.6
  Top Layer w0.3: R52.2 LED52.1
NetLED53_1: LED53.1 R53.2 | length 2.6
  Top Layer w0.3: R53.2 LED53.1
NetLED54_1: LED54.1 R54.2 | length 2.6
  Top Layer w0.3: R54.2 LED54.1
NetLED55_1: LED55.1 R55.2 | length 2.6
  Top Layer w0.3: R55.2 LED55.1
NetLED56_1: LED56.1 R56.2 | length 2.6
  Top Layer w0.3: R56.2 LED56.1
NetLED57_1: LED57.1 R57.2 | length 2.6
  Top Layer w0.3: R57.2 LED57.1
NetLED58_1: LED58.1 R58.2 | length 2.6
  Top Layer w0.3: R58.2 LED58.1
NetLED59_1: LED59.1 R59.2 | length 2.6
  Top Layer w0.3: R59.2 LED59.1
NetLED60_1: LED60.1 R60.2 | length 2.6
  Top Layer w0.3: R60.2 LED60.1
NetLED62_1: LED62.1 R62.2 | length 2.6
  Top Layer w0.3: R62.2 LED62.1
NetLED63_1: LED63.1 R63.2 | length 2.6
  Top Layer w0.3: R63.2 LED63.1
NetLED64_1: LED64.1 R64.2 | length 2.6
  Top Layer w0.3: R64.2 LED64.1
NetLED65_1: LED65.1 R65.2 | length 2.6
  Top Layer w0.3: R65.2 LED65.1
NetLED66_1: LED66.1 R66.2 | length 2.6
  Top Layer w0.3: R66.2 LED66.1
NetLED67_1: LED67.1 R67.2 | length 2.6
  Top Layer w0.3: R67.2 LED67.1
NetLED68_1: LED68.1 R68.2 | length 2.6
  Top Layer w0.3: R68.2 LED68.1
NetLED69_1: LED69.1 R69.2 | length 2.6
  Top Layer w0.3: R69.2 LED69.1
NetLED70_1: LED70.1 R70.2 | length 2.6
  Top Layer w0.3: R70.2 LED70.1
NetLED71_1: LED71.1 R71.2 | length 2.6
  Top Layer w0.3: R71.2 LED71.1
NetLED72_1: LED72.1 R72.2 | length 2.6
  Top Layer w0.3: R72.2 LED72.1
NetLED73_1: LED73.1 R73.2 | length 2.6
  Top Layer w0.3: R73.2 LED73.1
NetLED74_1: LED74.1 R74.2 | length 2.6
  Top Layer w0.3: R74.2 LED74.1
NetLED75_1: LED75.1 R75.2 | length 2.6
  Top Layer w0.3: R75.2 LED75.1
NetLED76_1: LED76.1 R76.2 | length 2.6
  Top Layer w0.3: R76.2 LED76.1
NetLED77_1: LED77.1 R77.2 | length 2.6
  Top Layer w0.3: R77.2 LED77.1
NetLED78_1: LED78.1 R78.2 | length 2.6
  Top Layer w0.3: R78.2 LED78.1
NetLED79_1: LED79.1 R79.2 | length 2.6
  Top Layer w0.3: R79.2 LED79.1
NetLED80_1: LED80.1 R80.2 | length 2.6
  Top Layer w0.3: R80.2 LED80.1
NRST: H1.3 PokerFace1.47 PokerFace1.86 | length 8.9
  Top Layer w1: PokerFace1.47 PokerFace1.86 H1.3
PA0: PokerFace1.11 R9.1 | length 3.8
  Top Layer w0.3: R9.1 PokerFace1.11
PA1: PokerFace1.35 R28.1 | length 18.1
  Top Layer w0.3: R28.1 v1(64.77,81.661)
  Bottom Layer w0.3: v1(64.77,81.661) 66.04,80.391 78.994,80.391 PokerFace1.35
PA2: PokerFace1.10 R8.1 | length 3.8
  Top Layer w0.3: R8.1 PokerFace1.10
PA3: PokerFace1.34 R29.1 | length 18.1
  Top Layer w0.3: R29.1 v1(64.77,79.121)
  Bottom Layer w0.3: v1(64.77,79.121) 66.04,77.851 78.994,77.851 PokerFace1.34
PA4: PokerFace1.12 R10.1 | length 3.8
  Top Layer w0.3: R10.1 PokerFace1.12
PA5: PokerFace1.33 R30.1 | length 18.1
  Top Layer w0.3: R30.1 v1(64.77,76.581)
  Bottom Layer w0.3: v1(64.77,76.581) 66.04,75.311 78.994,75.311 PokerFace1.33
PA6: PokerFace1.13 R11.1 | length 3.8
  Top Layer w0.3: R11.1 PokerFace1.13
PA7: PokerFace1.32 R31.1 | length 18.1
  Top Layer w0.3: R31.1 v1(64.77,74.041)
  Bottom Layer w0.3: v1(64.77,74.041) 66.04,72.771 78.994,72.771 PokerFace1.32
PA8: PokerFace1.73 R74.1 | length 3.8
  Top Layer w0.3: PokerFace1.73 R74.1
PA9: PokerFace1.59 R53.1 | length 18.1
  Top Layer w0.3: v1(133.858,68.961) R53.1
  Bottom Layer w0.3: PokerFace1.59 119.634,67.691 132.588,67.691 v1(133.858,68.961)
PA10: PokerFace1.74 R73.1 | length 3.8
  Top Layer w0.3: PokerFace1.74 R73.1
PA11: PokerFace1.58 R52.1 | length 18.1
  Top Layer w0.3: v1(133.858,71.501) R52.1
  Bottom Layer w0.3: PokerFace1.58 119.634,70.231 132.588,70.231 v1(133.858,71.501)
PA12: PokerFace1.75 R72.1 | length 3.8
  Top Layer w0.3: PokerFace1.75 R72.1
PA15: PokerFace1.57 R51.1 | length 18.1
  Top Layer w0.3: v1(133.858,74.041) R51.1
  Bottom Layer w0.3: PokerFace1.57 119.634,72.771 132.588,72.771 v1(133.858,74.041)
PB0: PokerFace1.15 R13.1 | length 3.8
  Top Layer w0.3: R13.1 PokerFace1.15
PB1: PokerFace1.30 R33.1 | length 18.1
  Top Layer w0.3: R33.1 v1(64.77,68.961)
  Bottom Layer w0.3: v1(64.77,68.961) 66.04,67.691 78.994,67.691 PokerFace1.30
PB4: PokerFace1.51 R45.1 | length 18.1
  Top Layer w0.3: v1(133.858,89.281) R45.1
  Bottom Layer w0.3: PokerFace1.51 119.634,88.011 132.588,88.011 v1(133.858,89.281)
PB5: PokerFace1.82 R65.1 | length 3.8
  Top Layer w0.3: PokerFace1.82 R65.1
PB6: PokerFace1.50 R44.1 | length 18.1
  Top Layer w0.3: v1(133.858,91.821) R44.1
  Bottom Layer w0.3: PokerFace1.50 119.634,90.551 132.588,90.551 v1(133.858,91.821)
PB7: PokerFace1.83 R64.1 | length 3.8
  Top Layer w0.3: PokerFace1.83 R64.1
PB8: PokerFace1.49 R43.1 | length 18.1
  Top Layer w0.3: v1(133.858,94.361) R43.1
  Bottom Layer w0.3: PokerFace1.49 119.634,93.091 132.588,93.091 v1(133.858,94.361)
PB9: PokerFace1.84 R63.1 | length 3.8
  Top Layer w0.3: PokerFace1.84 R63.1
PB10: PokerFace1.25 R38.1 | length 18.1
  Top Layer w0.3: R38.1 v1(64.77,56.261)
  Bottom Layer w0.3: v1(64.77,56.261) 66.04,54.991 78.994,54.991 PokerFace1.25
PB11: PokerFace1.21 R19.1 | length 3.8
  Top Layer w0.3: R19.1 PokerFace1.21
PB12: PokerFace1.24 R39.1 | length 18.1
  Top Layer w0.3: R39.1 v1(64.77,53.721)
  Bottom Layer w0.3: v1(64.77,53.721) 66.04,52.451 78.994,52.451 PokerFace1.24
PB13: PokerFace1.22 R20.1 | length 3.8
  Top Layer w0.3: R20.1 PokerFace1.22
PB14: PokerFace1.23 R40.1 | length 18.1
  Top Layer w0.3: R40.1 v1(64.77,51.181)
  Bottom Layer w0.3: v1(64.77,51.181) 66.04,49.911 78.994,49.911 PokerFace1.23
PB15: PokerFace1.66 R60.1 | length 18.1
  Top Layer w0.3: v1(133.858,51.181) R60.1
  Bottom Layer w0.3: PokerFace1.66 119.634,49.911 132.588,49.911 v1(133.858,51.181)
PC0: PokerFace1.8 R6.1 | length 3.8
  Top Layer w0.3: R6.1 PokerFace1.8
PC1: PokerFace1.37 R26.1 | length 18.1
  Top Layer w0.3: R26.1 v1(64.77,86.741)
  Bottom Layer w0.3: v1(64.77,86.741) 66.04,85.471 78.994,85.471 PokerFace1.37
PC2: PokerFace1.9 R7.1 | length 3.8
  Top Layer w0.3: R7.1 PokerFace1.9
PC3: PokerFace1.36 R27.1 | length 18.1
  Top Layer w0.3: R27.1 v1(64.77,84.201)
  Bottom Layer w0.3: v1(64.77,84.201) 66.04,82.931 78.994,82.931 PokerFace1.36
PC4: PokerFace1.14 R12.1 | length 3.8
  Top Layer w0.3: R12.1 PokerFace1.14
PC5: PokerFace1.31 R32.1 | length 18.1
  Top Layer w0.3: R32.1 v1(64.77,71.501)
  Bottom Layer w0.3: v1(64.77,71.501) 66.04,70.231 78.994,70.231 PokerFace1.31
PC6: PokerFace1.71 R76.1 | length 3.8
  Top Layer w0.3: PokerFace1.71 R76.1
PC7: PokerFace1.61 R55.1 | length 18.1
  Top Layer w0.3: v1(133.858,63.881) R55.1
  Bottom Layer w0.3: PokerFace1.61 119.634,62.611 132.588,62.611 v1(133.858,63.881)
PC8: PokerFace1.72 R75.1 | length 3.8
  Top Layer w0.3: PokerFace1.72 R75.1
PC9: PokerFace1.60 R54.1 | length 18.1
  Top Layer w0.3: v1(133.858,66.421) R54.1
  Bottom Layer w0.3: PokerFace1.60 119.634,65.151 132.588,65.151 v1(133.858,66.421)
PC10: PokerFace1.76 R71.1 | length 3.8
  Top Layer w0.3: PokerFace1.76 R71.1
PC11: PokerFace1.56 R50.1 | length 18.1
  Top Layer w0.3: v1(133.858,76.581) R50.1
  Bottom Layer w0.3: PokerFace1.56 119.634,75.311 132.588,75.311 v1(133.858,76.581)
PC12: PokerFace1.77 R70.1 | length 3.8
  Top Layer w0.3: PokerFace1.77 R70.1
PC13: PokerFace1.39 R24.1 | length 18.1
  Top Layer w0.3: R24.1 v1(64.77,91.821)
  Bottom Layer w0.3: v1(64.77,91.821) 66.04,90.551 78.994,90.551 PokerFace1.39
PC14: PokerFace1.7 R5.1 | length 3.8
  Top Layer w0.3: R5.1 PokerFace1.7
PC15: PokerFace1.38 R25.1 | length 18.1
  Top Layer w0.3: R25.1 v1(64.77,89.281)
  Bottom Layer w0.3: v1(64.77,89.281) 66.04,88.011 78.994,88.011 PokerFace1.38
PD0: PokerFace1.55 R49.1 | length 18.1
  Top Layer w0.3: v1(133.858,79.121) R49.1
  Bottom Layer w0.3: PokerFace1.55 119.634,77.851 132.588,77.851 v1(133.858,79.121)
PD1: PokerFace1.78 R69.1 | length 3.8
  Top Layer w0.3: PokerFace1.78 R69.1
PD2: PokerFace1.54 R48.1 | length 18.1
  Top Layer w0.3: v1(133.858,81.661) R48.1
  Bottom Layer w0.3: PokerFace1.54 119.634,80.391 132.588,80.391 v1(133.858,81.661)
PD3: PokerFace1.79 R68.1 | length 3.8
  Top Layer w0.3: PokerFace1.79 R68.1
PD4: PokerFace1.53 R47.1 | length 18.1
  Top Layer w0.3: v1(133.858,84.201) R47.1
  Bottom Layer w0.3: PokerFace1.53 119.634,82.931 132.588,82.931 v1(133.858,84.201)
PD5: PokerFace1.80 R67.1 | length 3.8
  Top Layer w0.3: PokerFace1.80 R67.1
PD6: PokerFace1.52 R46.1 | length 18.1
  Top Layer w0.3: v1(133.858,86.741) R46.1
  Bottom Layer w0.3: PokerFace1.52 119.634,85.471 132.588,85.471 v1(133.858,86.741)
PD7: PokerFace1.81 R66.1 | length 3.8
  Top Layer w0.3: PokerFace1.81 R66.1
PD8: PokerFace1.67 R80.1 | length 3.8
  Top Layer w0.3: PokerFace1.67 R80.1
PD9: PokerFace1.65 R59.1 | length 18.1
  Top Layer w0.3: v1(133.858,53.721) R59.1
  Bottom Layer w0.3: PokerFace1.65 119.634,52.451 132.588,52.451 v1(133.858,53.721)
PD10: PokerFace1.68 R79.1 | length 3.8
  Top Layer w0.3: PokerFace1.68 R79.1
PD11: PokerFace1.64 R58.1 | length 18.1
  Top Layer w0.3: v1(133.858,56.261) R58.1
  Bottom Layer w0.3: PokerFace1.64 119.634,54.991 132.588,54.991 v1(133.858,56.261)
PD12: PokerFace1.69 R78.1 | length 3.8
  Top Layer w0.3: PokerFace1.69 R78.1
PD13: PokerFace1.63 R57.1 | length 18.1
  Top Layer w0.3: v1(133.858,58.801) R57.1
  Bottom Layer w0.3: PokerFace1.63 119.634,57.531 132.588,57.531 v1(133.858,58.801)
PD14: PokerFace1.70 R77.1 | length 3.8
  Top Layer w0.3: PokerFace1.70 R77.1
PD15: PokerFace1.62 R56.1 | length 18.1
  Top Layer w0.3: v1(133.858,61.341) R56.1
  Bottom Layer w0.3: PokerFace1.62 119.634,60.071 132.588,60.071 v1(133.858,61.341)
PE0: PokerFace1.48 R42.1 | length 18.1
  Top Layer w0.3: v1(133.858,96.901) R42.1
  Bottom Layer w0.3: PokerFace1.48 119.634,95.631 132.588,95.631 v1(133.858,96.901)
PE1: PokerFace1.85 R62.1 | length 3.8
  Top Layer w0.3: PokerFace1.85 R62.1
PE2: PokerFace1.4 R2.1 | length 3.8
  Top Layer w0.3: R2.1 PokerFace1.4
PE3: PokerFace1.41 R22.1 | length 18.1
  Top Layer w0.3: R22.1 v1(64.77,96.901)
  Bottom Layer w0.3: v1(64.77,96.901) 66.04,95.631 78.994,95.631 PokerFace1.41
PE4: PokerFace1.5 R3.1 | length 3.8
  Top Layer w0.3: R3.1 PokerFace1.5
PE5: PokerFace1.40 R23.1 | length 18.1
  Top Layer w0.3: R23.1 v1(64.77,94.361)
  Bottom Layer w0.3: v1(64.77,94.361) 66.04,93.091 78.994,93.091 PokerFace1.40
PE6: PokerFace1.6 R4.1 | length 3.8
  Top Layer w0.3: R4.1 PokerFace1.6
PE7: PokerFace1.16 R14.1 | length 3.8
  Top Layer w0.3: R14.1 PokerFace1.16
PE8: PokerFace1.29 R34.1 | length 18.1
  Top Layer w0.3: R34.1 v1(64.77,66.421)
  Bottom Layer w0.3: v1(64.77,66.421) 66.04,65.151 78.994,65.151 PokerFace1.29
PE9: PokerFace1.17 R15.1 | length 3.8
  Top Layer w0.3: R15.1 PokerFace1.17
PE10: PokerFace1.28 R35.1 | length 18.1
  Top Layer w0.3: R35.1 v1(64.77,63.881)
  Bottom Layer w0.3: v1(64.77,63.881) 66.04,62.611 78.994,62.611 PokerFace1.28
PE11: PokerFace1.18 R16.1 | length 3.8
  Top Layer w0.3: R16.1 PokerFace1.18
PE12: PokerFace1.27 R36.1 | length 18.1
  Top Layer w0.3: R36.1 v1(64.77,61.341)
  Bottom Layer w0.3: v1(64.77,61.341) 66.04,60.071 78.994,60.071 PokerFace1.27
PE13: PokerFace1.19 R17.1 | length 3.8
  Top Layer w0.3: R17.1 PokerFace1.19
PE14: PokerFace1.26 R37.1 | length 18.1
  Top Layer w0.3: R37.1 v1(64.77,58.801)
  Bottom Layer w0.3: v1(64.77,58.801) 66.04,57.531 78.994,57.531 PokerFace1.26
PE15: PokerFace1.20 R18.1 | length 3.8
  Top Layer w0.3: R18.1 PokerFace1.20

## Keep-outs
Keep-Out Layer:
  the board outline again, w0.3